# Altium PCB DIMNode012014.PcbDoc
Units mil, origin at the board's own origin, x right, y up, seen from the top; angles counter-clockwise.
Board outline 5320 x 3600 mil, 2 copper layers (TopLayer, BottomLayer); 120 components, 100 nets, 378 pads, 60 vias.
Unrouted connection lines stored in the file: 1.
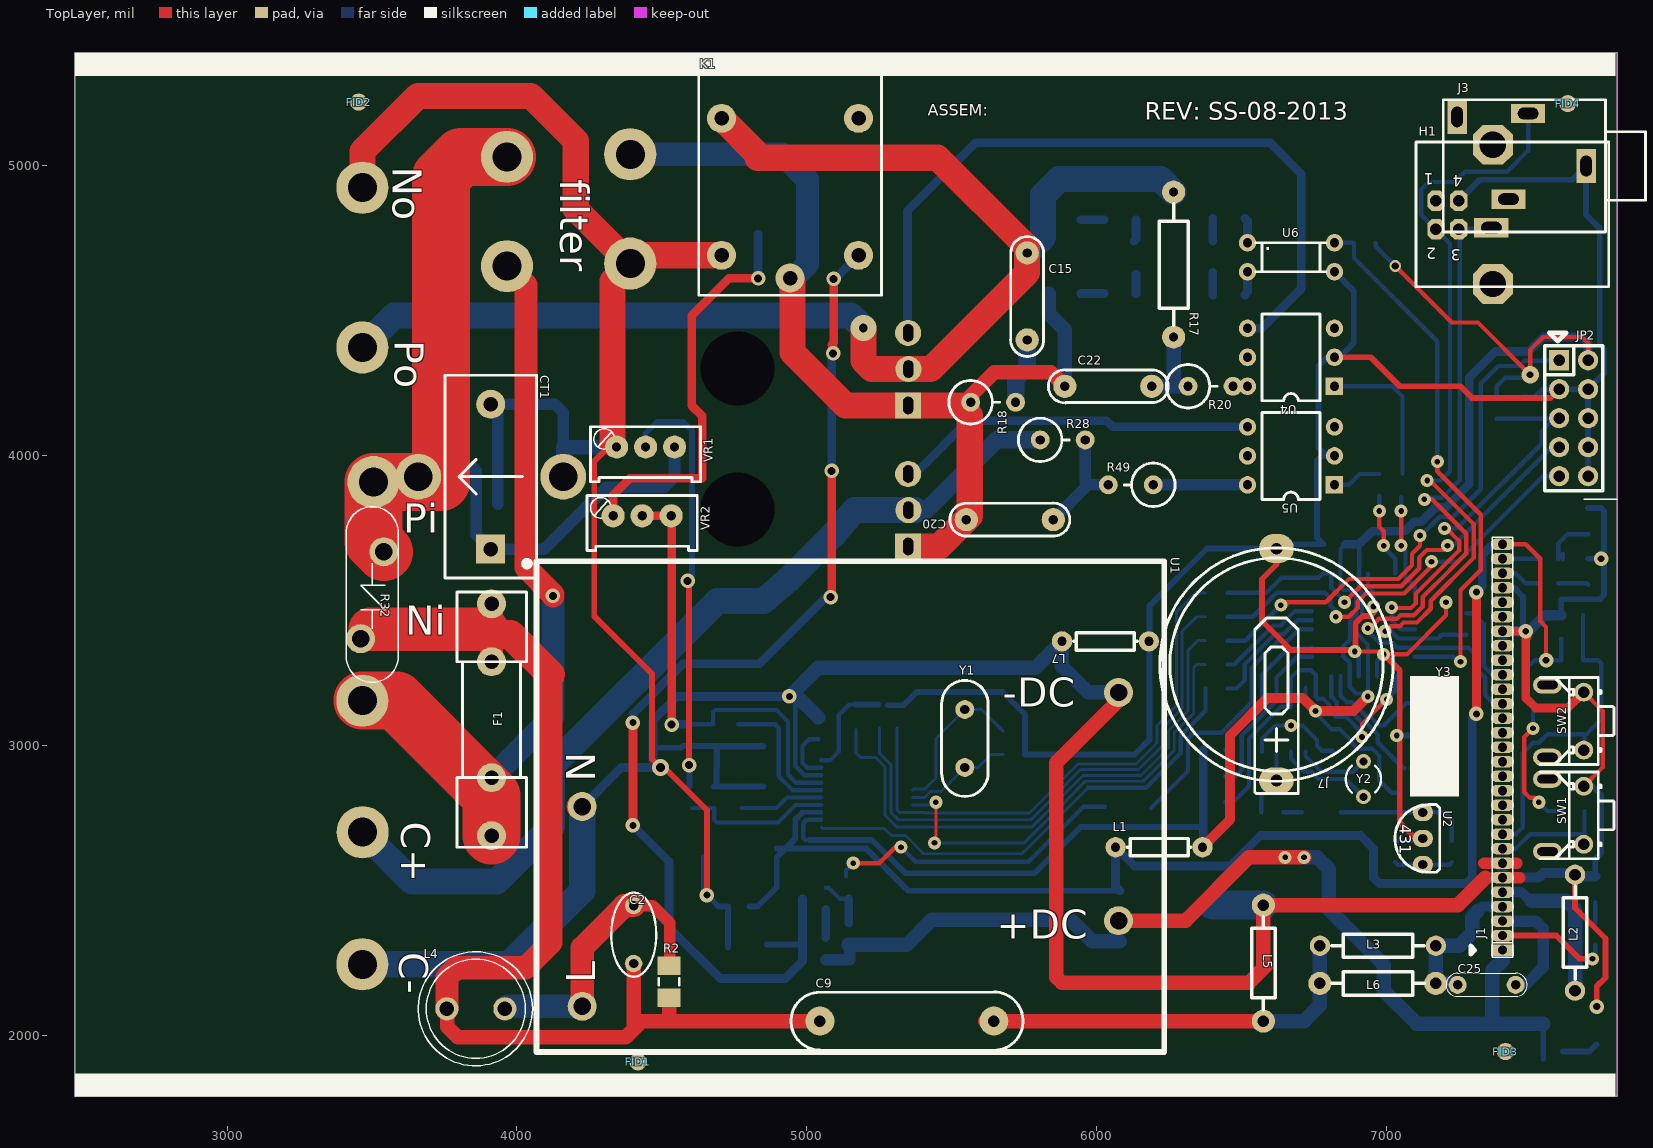
[diagram p0: TopLayer view]
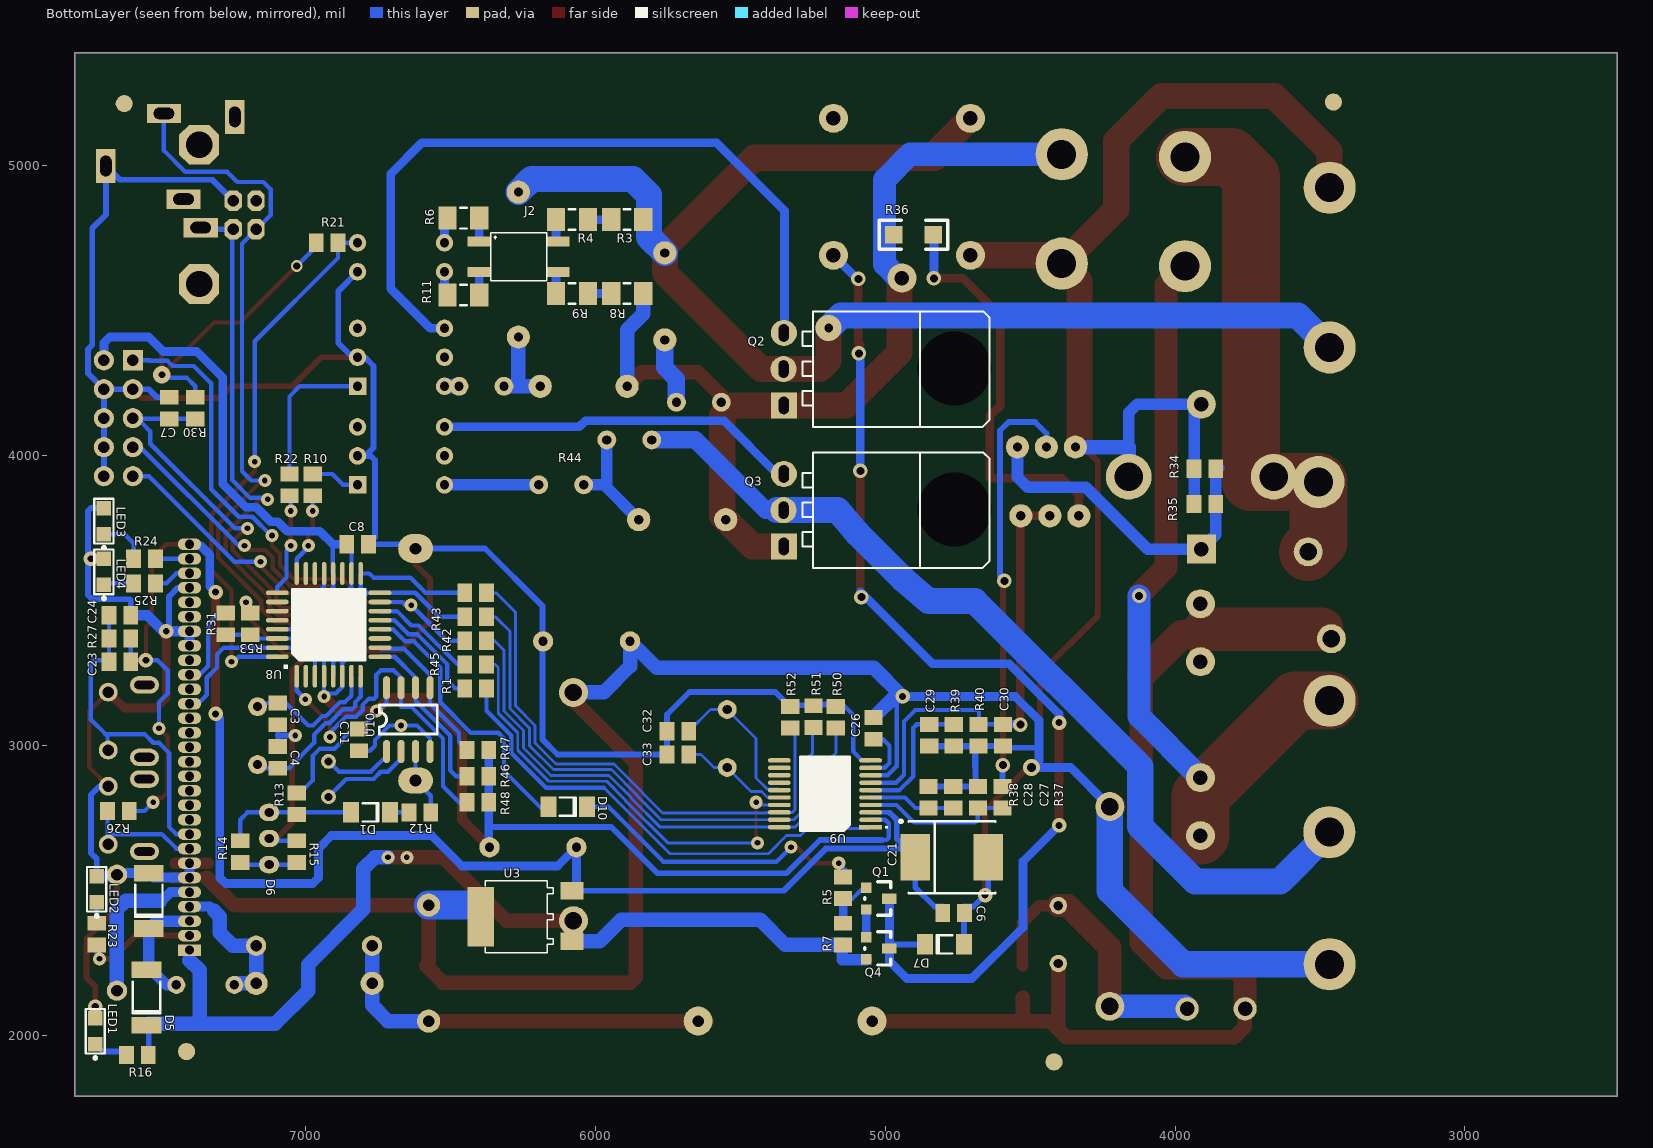
[diagram p1: BottomLayer view, seen from below]

## Layer stack, top to bottom
TopLayer: signal copper 1.4
Dielectric: dielectric 12.6, FR-4, Dk 4.8
BottomLayer: signal copper 1.4

## Board outline
2475,1790 2475,5390 7795,5390 7795,1790

## Design rules (kind name [scope] priority, off if disabled: settings)
Clearance Clearance_1 [All vs (InPoly)] p1: gap=15
Clearance [All] p2: gap=10
ComponentClearance [All] p1 off: gap=10 collisioncheckmode=3 verticalgap=10 showdistances=FALSE
FabricationTestPointUsage TestPointUsage [All] p1: valid=0 allowmultiple=FALSE
FabricationTestpoint Testpoint [All] p1: side=3 testpointundercomponent=TRUE minsize=40 maxsize=100 preferedsize=60 minholesize=20 maxholesize=40 preferedholesize=32 testpointgrid=1 allowsidetop=TRUE allowsidebottom=TRUE usegrid=TRUE gridtolerance=0.01
HoleSize HoleSize_1 [All] p1: absolutevalues=TRUE maxlimit=1000 minlimit=0 maxpercent=80.000 minpercent=20.000
PasteMaskExpansion PasteMaskExpansion_1 [HasPad('DES*')] p1: expansion=-160
PasteMaskExpansion [All] p2: expansion=0
PolygonConnect [All vs IsVia] p1: connectstyle=Direct reliefconductorwidth=20 reliefentries=4 polygonreliefangle="90 Angle"
PolygonConnect PolygonConnect_1 [All] p2: connectstyle=Relief reliefconductorwidth=20 reliefentries=4 polygonreliefangle="90 Angle"
RoomDefinition DIMNode062013 [InComponentClass('DIMNode062013')] p1 off: confinementstyle=ConfineIn formatcopy=TRUE lockcomponents=FALSE outline 0,0 2000,0 2000,1000 0,1000
RoutingVias [All] p1: holewidth=25 width=40 viastyle="Through Hole" minholewidth=15 minwidth=30 maxholewidth=80 maxwidth=150
SilkscreenOverComponentPads [IsPad] p1: minsilkscreentomaskgap=10
SolderMaskExpansion SolderMaskExpansion_1 [HasPad('DES*')] p1: expansion=40
SolderMaskExpansion [All] p2: expansion=4
Width [All] p1: maxlimit=1000 minlimit=10 preferedwidth=30
22 further rules are at their usual default settings.

## Components (designator, comment, footprint, x,y, rotation, side; value= is the part's Value field where it differs from the comment)
C2 "15nF" CAPNTO5.08-7.37x3.94 4402.56,2348.43 r90 top
C3 "22p" 2012[0805] 7095,3110 r270 bottom
C4 "22p" 2012[0805] 7095,2960 r90 bottom
C6 "104" 2012[0805] 4763.78,2423.23 r180 bottom
C7 "104" 2012[0805] 7470,4165 r90 bottom
C8 "104" 2012[0805] 6820,3695 r0 bottom
C9 "104/275VAC" 100N400V 5045,2050 r0 top
C11 "104" 2012[0805] 6815,3020 r270 bottom
C15 "103/2kV" 104TO 5760,4700 r270 top
C20 "103/2kV" 104TO 5550,3780 r0 top
C21 "100u25V" TC7360-2924 4770,2615 r180 bottom
C22 "103/2kV" 104TO 6190,4240 r180 top
C23 "68p" 2012[0805] 7640,3290 r180 bottom
C24 "68p" 2012[0805] 7640,3450 r180 bottom
C25 "105" CSIP3 7445,2175 r180 top
C26 "104" 2012[0805] 5040,3060 r90 bottom
C27 "333" 2012[0805] 4680,2822.4 r90 bottom
C28 "333" 2012[0805] 4765,2822.4 r90 bottom
C29 "333" 2012[0805] 4848.03,3036.42 r270 bottom
C30 "333" 2012[0805] 4593.03,3036.42 r270 bottom
C32 "22p" 2012[0805] 5715,3050 r0 bottom
C33 "22p" 2012[0805] 5715,2970 r0 bottom
CT1 "AX0500" CT-NHO 3909.45,3678.15 r90 top
D1 "1N4148" SOD-80/MLL34 6775,2770 r180 bottom
D5 "M7" MELF-D5022-2009 7548.23,2131.89 r270 bottom
D6 "M7" MELF-D5022-2009 7540,2465 r270 bottom
D7 "1N4148" SOD-80/MLL34 4795.28,2314.96 r0 bottom
D10 "Z9V" SOD-80/MLL34 6095,2790 r180 bottom
F1 "FUSE 5A" FUSE2 3912.4,2889.76 r90 top
FID1 "FIDUCIALMASK" FIDUCIALMASK 4417.32,1909.45 r0 top
FID2 "FIDUCIALMASK" FIDUCIALMASK 3453.74,5220.47 r0 top
FID3 "FIDUCIALMASK" FIDUCIALMASK 7410,1945 r0 top
FID4 "FIDUCIALMASK" FIDUCIALMASK 7625,5215 r0 top
H1 "USB" USB-B-STRANGE 7170,4880 r180 top
J1 "PL3120 Module" ECHELONMODULE 7400,2295 r90 top
J2 "Bridge 1A SMD" CAUSMD 6400,4740 r180 bottom
J3 "DEBUG" SJ-3515 7755,5000 r270 top (schematic designator J2)
J7 "BATTERY" pincucao 6620,2880 r180 top
JP2 "ICSP" IDC10 7595,4330 r270 top
K1 "Relay" RELAYVUONG 4705.71,4691.93 r0 top
L1 "10uH/2A" axial0.3 6065,2650 r0 top
L2 "680uH" AXIAL0.4#1 7650,2155 r90 top
L3 "10uH" AXIAL0.4#1 7170,2310 r180 top
L4 "330uH" CAMTRONDUNG 3758.86,2092.52 r0 top
L5 "680uH" axial0.4 6575,2050 r90 top
L6 "10uH" AXIAL0.4#2 7170,2180 r180 top
L7 "choke" axial0.3 5880,3360 r0 top
LED1 "TXON_LED" LED0805 7725,2015 r90 bottom
LED2 "TXON_LED" LED0805 7720,2505 r90 bottom
LED3 "PKD_LED" LED0805 7695,3775 r90 bottom
LED4 "BIU_LED" LED0805 7695,3600 r90 bottom
Q1 "2N3906" SOT-23 5065,2510 r270 bottom
Q2 "BTA20" TO254 5349.41,4174.21 r180 bottom
Q3 "BTA20" TO254 5349.41,3687.6 r180 bottom
Q4 "2N3906" SOT-23 5064.96,2338.58 r270 bottom
R1 "100R" 2012[0805] 6412.6,3197.5 r0 bottom
R2 "330" 3216[1206] 4524.61,2186.02 r270 top
R3 "10k 1/4W" 3216[1206] 5889.88,4815 r180 bottom
R4 "10k 1/4W" 3216[1206] 6080,4815 r180 bottom
R5 "2K2" 2012[0805] 5145,2510 r270 bottom
R6 "10k 1/4W" 3216[1206] 6455,4820 r180 bottom
R7 "2k2" 2012[0805] 5145,2350 r270 bottom
R8 "10k 1/4W" 3216[1206] 5890,4560 r180 bottom
R9 "10k 1/4W" 3216[1206] 6080,4560 r180 bottom
R10 "470R" 2012[0805] 6975,3900 r90 bottom
R11 "10k 1/4W" 3216[1206] 6455,4555 r180 bottom
R12 "470R" 2012[0805] 6605,2770 r0 bottom
R13 "220R" 2012[0805] 7030,2800 r90 bottom
R14 "4k7" 2012[0805] 7225,2635 r90 bottom
R15 "10k" 2012[0805] 7030,2635 r270 bottom
R16 "1k" 2012[0805] 7579.72,1933.07 r0 bottom
R17 "470R/1W" AXIAL0.5 6265,4410 r90 top
R18 "33R/1W" R1W_DUNG 5564.96,4185.04 r180 top
R20 "470R/1W" R1W_DUNG 6315,4240 r180 top
R21 "2k2" 2012[0805] 6925,4735 r0 bottom
R22 "470R" 2012[0805] 7055,3900 r270 bottom
R23 "1K" 2012[0805] 7720,2350 r90 bottom
R24 "1K" 2012[0805] 7555,3645 r0 bottom
R25 "1K" 2012[0805] 7555,3560 r0 bottom
R26 "1K" 2012[0805] 7645,2775 r0 bottom
R27 "1K" 2012[0805] 7640,3370 r0 bottom
R28 "470R/1W" R1W_DUNG 5805,4055 r180 top
R30 "10K" 2012[0805] 7380,4165 r90 bottom
R31 "470R" 2012[0805] 7275,3420 r90 bottom
R32 "MOV 14D471" MOV471 3460.63,3369.09 r90 top
R34 "220R" 2012[0805] 3896.65,3955.71 r180 bottom
R35 "220R" 2012[0805] 3896.65,3833.66 r180 bottom
R36 "820k" 1206 4834.65,4762.8 r0 bottom
R37 "1k" 2012[0805] 4595,2822.4 r90 bottom
R38 "1k" 2012[0805] 4850,2822.4 r90 bottom
R39 "1k" 2012[0805] 4763.03,3036.42 r270 bottom
R40 "1k" 2012[0805] 4678.03,3036.42 r90 bottom
R42 "10R" 2012[0805] 6412.6,3362.5 r180 bottom
R43 "10R" 2012[0805] 6412.6,3445 r180 bottom
R44 "10R" 2012[0805] 6412.6,3527.5 r180 bottom
R45 "10R" 2012[0805] 6412.6,3280 r180 bottom
R46 "2k2" 2012[0805] 6405,2895 r180 bottom
R47 "2k2" 2012[0805] 6405,2985 r180 bottom
R48 "2k2" 2012[0805] 6405,2805 r180 bottom
R49 "470R/1W" R1W_DUNG 6195,3900 r0 top
R50 "470R" 2012[0805] 5170.28,3098.43 r90 bottom
R51 "470R" 2012[0805] 5247.05,3100.39 r90 bottom
R52 "470R" 2012[0805] 5327.76,3098.43 r90 bottom
R53 "5k6" 2012[0805] 7190,3420 r90 bottom
SW1 "SERVICE" CTCHIPNGANG 7680,2660 r90 top
SW2 "RESET" CTCHIPNGANG 7680,2985 r90 top
U1 "APCN" APCN 4225,2790 r0 top
U2 "TL431" TL431 7125,2770 r270 top
U3 "7805" J7805 6080,2325 r90 bottom
U4 "MOC3021" DIP6 6820,4240 r180 top
U5 "MOC3041" DIP6 6820,3900 r180 top
U6 "PC817" TLP521 6520,4735 r180 top
U8 "ATMEGA8" ATMEGA8 7030,3240 r180 bottom
U9 "ADE7753" ADE775X 5050.04,2719.02 r0 bottom
U10 "DS1307" SO-8 6720,2980 r90 bottom
VR1 "1k" BTXANH 4343.5,4030.51 r0 top
VR2 "100K" BTXANH 4331.69,3793.31 r0 top
Y1 "3.57954 MHz" XTAL 5545,3125 r270 top
Y2 "32,768k" R38 6920,2885 r0 top
Y3 "8 MHz" XTAL 7165,3135 r270 top

## Footprints (in the part's own frame and the unit in brackets; to place one, negate y for a bottom-side part, rotate by r counter-clockwise, add the part's x,y. Pads: shape width x height; smd on the part's side, far side on the other; paste and mask are expansions set on the pad)
100N400V [mil]
  round 100 hole 40: 1(0,0) 2(600,0)
  silkscreen extent -99,-101 700,101
104TO [mil]
  round 80 hole 32: 1(0,0) 2(300,0)
  silkscreen extent -57,-57 357,57
1206 [mil]
  rect 60x60 smd: 1(0,0) 2(135,0)
  silkscreen extent -50,-50 185,50
2012[0805] [mm] "Metal Electrode Face (MELF) Resistor; Body 2 x 1.4 mm (LxDia)"
  rect 1.3x1.6 smd: 1(-0.95,0) 2(0.95,0)
3216[1206] [mm] "Metal Electrode Face (MELF) Resistor; Body 3.2 x 1.8 mm (LxDia)"
  rect 1.6x2 smd: 1(-1.4,0) 2(1.4,0)
  silkscreen extent -0.3,-0.9 0.3,0.9
ADE775X [mm]
  rect 2x0.381 smd: 1(0,0)
  oval 2x0.381 smd: 2(0,-0.65) 3(0,-1.3) 4(0,-1.95) 5(0,-2.6) 6(0,-3.25) 7(0,-3.9) 8(0,-4.55) 9(0,-5.2) 10(0,-5.85) 11(8,-5.85) 12(8,-5.2) 13(8,-4.55) 14(8,-3.9) 15(8,-3.25) 16(8,-2.6) 17(8,-1.95) 18(8,-1.3) 19(8,-0.65) 20(8,0)
  silkscreen extent -1.52,-6.18 6.17,0.33
APCN [mm] "AC - DC convert module 15W"
  round 2.54 hole 1.524: 2(0,0) 3(0,-17.5) 4(47,10) 6(47,-10)
  silkscreen extent -4,-21.5 51,21.5
ATMEGA8 [mm]
  oval 0.4x2 smd: 1(0,0) 2(0.8,0) 3(1.6,0) 4(2.4,0) 5(3.2,0) 6(4,0) 7(4.8,0) 8(5.6,0) 17(5.6,9) 18(4.8,9) 19(4,9) 20(3.2,9) 21(2.4,9) 22(1.6,9) 23(0.8,9) 24(0,9)
  oval 2x0.4 smd: 9(7.3,1.7) 10(7.3,2.5) 11(7.3,3.3) 12(7.3,4.1) 13(7.3,4.9) 14(7.3,5.7) 15(7.3,6.5) 16(7.3,7.3) 25(-1.7,7.3) 26(-1.7,6.5) 27(-1.7,5.7) 28(-1.7,4.9) 29(-1.7,4.1) 30(-1.7,3.3) 31(-1.7,2.5) 32(-1.7,1.7)
  silkscreen extent -1.16,0.64 5.97,7.62
axial0.3 [mil]
  round 70 hole 32: 1(0,0) 2(300,0)
  silkscreen extent 41,-30 259,30
AXIAL0.4#1 [mil]
  round 70 hole 40: 1(0,0) 2(400,0)
  silkscreen extent 40,-40 360,40
AXIAL0.4#2 [mil]
  round 80 hole 40: 1(0,0) 2(400,0)
  silkscreen extent 40,-40 360,40
axial0.4 [mil]
  round 80 hole 40: 1(0,0) 2(400,0)
  silkscreen extent 40,-40 360,40
AXIAL0.5 [mil]
  round 80 hole 32: 1(0,0) 2(500,0)
  silkscreen extent 40,-50 460,50
BTXANH [mil]
  round 80 hole 32: 1(0,0) 2(100,0) 3(200,0)
  silkscreen extent -90,-120 290,70
CAMTRONDUNG [mil]
  round 80 hole 50: 1(-0.63,0) 2(199.37,0)
  silkscreen extent -99,-197 295,197
CAPNTO5.08-7.37x3.94 [mil] "Capacitor, Radial, Tantalum, Non-Polarised; Body 7.37 x 3.94 x 6.86 mm (WxTxH max); Pin Spacing 5.08 mm (typ)"
  round 60 hole 32: 1(-100,0) 2(100,0)
  silkscreen extent -145,-78 145,77
CAUSMD [mil]
  rect 80x35 smd: 1(0,0) 2(271.65,0) 3(271.65,-106.3) 4(0,-106.3)
  silkscreen extent 39,-136 232,30
CSIP3 [mil]
  round 62 hole 32: 1(0,0) 2(200,0)
  silkscreen extent -40,-40 240,40
CT-NHO [mm]
  rect 2.54x2.54 hole 1.27: 1(0,0)
  round 4 hole 2.5: 2(6.35,-6.35) 4(6.35,6.35)
  round 2.54 hole 1.27: 3(12.7,0)
  silkscreen extent -2.54,-4 15.24,4
CTCHIPNGANG [mil]
  oval 60x100 hole 30 slot 70 at 90 deg: 0(-25,125) 0(225,125)
  round 65 hole 40: 1(0,0) 2(200,0)
  silkscreen extent -50,-105 250,150
DIP6 [mil]
  rect 60x60 hole 32: 1(0,0)
  round 60 hole 32: 2(0,-100) 3(0,-200) 4(300,-200) 5(300,-100) 6(300,0)
  silkscreen extent 50,-250 250,50
ECHELONMODULE [mil]
  rect 40x80 hole 32: 1(0,0)
  oval 40x80 hole 32: 2(50,0) 3(100,0) 4(150,0) 5(200,0) 6(250,0) 7(300,0) 8(350,0) 9(400,0) 10(450,0) 11(500,0) 12(550,0) 13(600,0) 14(650,0) 15(700,0) 16(750,0) 17(800,0) 18(850,0) 19(900,0) 20(950,0) 21(1000,0) 22(1050,0) 23(1100,0) 24(1150,0) 25(1200,0) 26(1250,0) 27(1300,0) 28(1350,0) 29(1400,0)
  silkscreen extent -25,-35 1425,35
FIDUCIALMASK [mm]
  round 1.5 all layers, no hole: 1(0,0)
FUSE2 [mil]
  round 100 hole 50: 1(-200,0) 1(0,0) 2(400,0) 2(600,0)
  silkscreen extent -240,-120 640,120
IDC10 [mil]
  rect 70x70 hole 40: 1(0,0)
  round 70 hole 40: 2(0,100) 3(100,0) 4(100,100) 5(200,0) 6(200,100) 7(300,0) 8(300,100) 9(400,0) 10(400,100)
  silkscreen extent -50,-50 450,150
J7805 [mil]
  rect 60x80 smd: 1(0,0) 3(175,0)
  rect 205x90 smd: 2(85,315)
  silkscreen extent -40,65 210,300
LED0805 [mil] "Chip Resistor; Body 2.0 x 1.3 mm (LxW typ)"
  rect 50x50 smd: 1(-45,0) 2(45,0)
  silkscreen extent -97,-33 77,33, body extent -60,-25 60,25, height 47
MELF-D5022-2009 [mm] "Metal Electrode Face (MELF) Diode; Body 5 x 2.5 mm (LxDia)"
  rect 1.45x2.6 smd: 1(-2.425,0) 2(2.425,0)
  silkscreen extent -1.4,-1.2 1.4,1.2
MOV471 [mil]
  round 100 hole 60: 1(0,0) 2(300,-80)
  silkscreen extent -150,-130 455,50
pincucao [mil]
  oval 120x90 hole 40: 1(0,0)
  oval 120x100 hole 40: 2(0,-800)
  silkscreen extent -403,-803 403,45
R1W_DUNG [mil]
  round 65 hole 32: 1(0,0) 2(-155,0)
  silkscreen extent -100,-75 75,75
R38 [mm] "Crystal, Thru-Hole; 2 Leads; Body 3.1 x 8.2 mm (Dia.xH)"
  round 1.3 hole 0.7: 1(0,1.55) 2(0,-1.55)
  silkscreen extent -1.55,-1.19 1.55,1.17
RELAYVUONG [mm]
  round 2.54 hole 1.27: 1(6,-2) 2(0,12) 3(12,12) 4(12,0) 5(0,0)
  silkscreen extent -2,-3.5 14,16
SJ-3515 [mm] "3.5mm AUDIO JACK-STEREO"
  rect 3x1.7 hole 1 slot 1.8 at 0 deg: 1(0,-1.7) 5(-4.3,-13)
  rect 1.7x3 hole 1 slot 1.8 at 90 deg: 2(-4.6,-6.78) 3(2.9,-8.5) 4(5.4,-10)
  silkscreen extent -5.8,-14.21 5.8,3.5
SO-8 [mil]
  oval 80x24 smd: 1(0,0) 2(0,-50) 3(0,-100) 4(0,-150) 5(220,-150) 6(220,-100) 7(220,-50) 8(220,0)
  silkscreen extent 60,-175 160,25
SOD-80/MLL34 [mm] "Metal Electrode Face (MELF) Diode; Body 3.5 x 1.7 mm (LxDia)"
  rect 1.4x1.8 smd: 1(-1.7,0) 2(1.7,0)
  silkscreen extent -0.7,-0.8 0.7,0.8
SOT-23 [mil]
  rect 36x36 smd: 1(0,0) 2(75,0)
  rect 36x50 smd: 3(38,80)
  silkscreen extent -20,-5 95,85
TC7360-2924 [mm] "Capacitor, SM Tantalum; Body 7.3 x 6.0 mm (LxW typ)"
  rect 2.6x4.1 smd: 1(-3.2,0) 2(3.2,0)
  silkscreen extent -4.58,-3.15 3.8,3.27
TL431 [mil]
  oval 60x70 hole 32: 1(0,0) 2(90,0) 3(180,0)
  silkscreen extent -27,-96 207,58
TLP521 [mil]
  round 60 hole 32: 1(0,0) 2(0,100) 3(-300,0) 4(-300,100)
  silkscreen extent -270,0 -30,100
TO254 [mil] "D-PAK, 4-Leads, Body 8x9.4mm, Pitch 2.54mm, Lead Span 10.6mm, IPC Low Density"
  rect 90x90 hole 35 slot 60 at 90 deg: 1(0,0)
  round 90 hole 35 slot 60 at 90 deg: 2(-0.94,125) 3(0,250)
  round 236.22 hole 255.91: H(589.06,127)
  silkscreen extent 65,-75 710,324, body extent 250,-63 713,313, height 81
USB-B-STRANGE [mm] "USB Type B - STRANGE - Slave Device"
  oct 1.5x1.8 hole 1: 1(0,0) 2(0,2.5) 3(-2,2.5) 4(-2,0)
  oct 3.5x3.5 hole 2.3: 5(-4.988,7.283) 6(-4.988,-4.909)
  silkscreen extent -15.15,-5.16 1.74,7.54, body extent -15.45,-6.18 0.85,8.68, height 10.98
XTAL [mil]
  round 65 hole 32: 1(0,0) 2(200,0)
  silkscreen extent -100,-80 300,80

## Part data
C2 C6 C7 C8 C9 C11 C15 C20 C22 C23 C24 C25: library part CAP, "Capacitor"
C3 C4 C26 C27 C28 C29 C30 C32 C33: library part CAP
C21: library part "CAPACITOR POL", "Capacitor"
CT1: library part AX-0500
D1 D7: library part "Diode 1N4007", "1 Amp General Purpose Rectifier"
D5 D6 LED1 LED2 LED3 LED4: library part DIODE
D10: library part ZENER2, "Zener Diode"
F1: library part FUSE2, "Fuse"
J1: library part CON29, "Connector"
J2: library part "Diode Bridge Flate", "Diode Bridge"
J3: library part USB_B
J7: library part CON2, "Connector"
JP2: library part "HEADER 5X2"
K1: "SPDT Relay"
L1 L4 L5: library part "INDUCTOR IRON"
L2 L3 L6: library part INDUCTOR
L7: library part Inductor
Q1 Q4: library part PNP1, "PNP Transistor"
Q2 Q3: library part TRIAC
R1 R3 R4 R6 R8 R9 R11 R12 R13 R14 R15 R16 R17 R18 R20 R21 R22 R23 R24 R25 R26 R27 R28 R30 R31 R49: library part RES1
R2 R5 R7 R10 R50 R51 R52 R53: library part "Res Semi", "Semiconductor Resistor"
R32: library part MOV
R34 R35 R36 R37 R38 R39 R40 R42 R43 R44 R45 R46 R47 R48: library part RES2
SW1 SW2: library part SW-PB
U1: library part Component_1
U2: "Adjustable Precision Shunt Regulator"
U3: library part MC7805T
U4 U5: library part OPTOTRIAC
U6: library part OPTOISO1, "Optoisolator"
U8: library part ATMEGA8-A, "TQFP package"
U9: library part ADE775X
U10: library part DS1307(8), "64x8 SERIAL REAL TIME CLOCK"
VR1 VR2: library part RPot, "Potentiometer"
Y1 Y3: library part CRYSTAL, "Crystal"
Y2: library part XTAL, "Crystal Oscillator"

## Free pads (board coordinates)
  round 10 hole 60 slot 400 at 90 deg: 0(1698.82,3017.72)
  round 180 hole 100: 0(3466.54,3155.51) 0(3965.55,4654.53) 0(3965.55,5031.5) 2(3504.92,3909.45) 4(3466.54,2246.06) 4(3467.52,2701.77) 4(4390.75,4663.39) 4(4390.75,5040.35) 5(3466.54,4374.02) 6(3466.54,4925.2)

## Via types
v1: diameter 45, hole 19.68, TopLayer to BottomLayer, 37 vias
v2: diameter 50, hole 28, TopLayer to BottomLayer, 9 vias
v3: diameter 50, hole 23.62, TopLayer to BottomLayer, 9 vias
v4: diameter 90, hole 30, TopLayer to BottomLayer, 1 vias
v5: diameter 60, hole 23.62, TopLayer to BottomLayer, 1 vias
v6: diameter 40, hole 25, TopLayer to BottomLayer, 1 vias
v7: diameter 50, hole 25, TopLayer to BottomLayer, 1 vias
v8: diameter 60, hole 32, TopLayer to BottomLayer, 1 vias

## Nets (pads, with @x,y where several pads share a name; then routed paths per layer and width w, separated by ;. In a path a pad name is that pad's centre, name@x,y a point inside that pad or via, vN(x,y) a via of type N, cw(c..) or ccw(c..) an arc to the next point about the centre after c; other vN are vias at no path point)
3V7: D1.1 R13.1 R14.2 U2.1 | length 466
  BottomLayer w15: D1.1 U2.1 7200,2770 7225,2745 R14.2
AGND: C6.2 C21.2 C24.2 C26.2 C27.2 C28.2 C29.2 C30.2 CT1.2 CT1.3 D6.1 D7.1 J1.6 J1.7 J1.22 J1.23 J1.26 K1.5 L2.2 L5.2 L7.1 LED1.2 LED2.2 LED3.2 LED4.2 pad.4@3466.54,2246.06 pad.4@4390.75,4663.39 pad.6 R34.1 R35.1 R38.2 R39.2 R40.1 SW1.2 SW2.2 U1.2 U1.4 U3.2 U9.8 VR1.1 | length 17135.9
  TopLayer w15: SW1.2 7745,2925 7745,3120 SW2.2
  TopLayer w20: VR1.1@4329.72,4044.29 4266.73,3981.3 4266.73,3446.85 4465.55,3248.03 4465.55,2954.45 v8(4495,2925) 4508.07,2925 4655,2778.07 v3(4655,2485) ; L2.2 7650,2440 7755,2335 7755,2200 7725,2170 v7(7725,2100)
  TopLayer w30: J1.23 7465,3395 7485,3375 7480,3370 7480,3165 7515,3130 7625,3130 SW2.2
  TopLayer w35: 7340,2545 J1.6
  TopLayer w39: 7335,2595 J1.7 7449.53,2595 ; J1.6 7459.53,2545
  TopLayer w50: U1.4 6075.39,3157.09 5860.24,2941.93 5860.24,2201.77 5878.94,2183.07 6525.59,2183.07 6583.66,2241.14 6575,2249.8 L5.2 7245,2450 7340,2545
  TopLayer w90: pad.6 3466.54,5050.2 3658.46,5242.13 4047.24,5242.13 4202.76,5086.61 4202.76,4851.38 pad.4@4390.75,4663.39 ; U1.2@4215.91,2790 U1.2 ; VR1.1@4329.72,4044.29 4329.72,4602.36 pad.4@4390.75,4663.39 ; K1.5 4419.29,4691.93 pad.4@4390.75,4663.39
  BottomLayer w15: v3(4940,3170) 4960,3150 4960,2929.64 4991.49,2898.15 U9.8
  BottomLayer w20: 4469.49,2993.11 4565.94,2993.11 4572.83,3000 4687.99,3000 R40.1@4687.99,2999.02 ; C30.2 R40.1 R40.1@4687.99,2999.02 ; C21.2 4644.02,2495.98 v3(4655,2485) 4695,2445 4727.6,2445 4728.07,2444.53 D7.1@4728.07,2304.13 ; C27.2 4687.99,2867.8 R40.1@4687.99,2999.02 ; C27.2@4690,2859.8 C28.2 ; 4690,2925.2 4690,2997.05 4850,2997.05 C29.2 R39.2 R40.1@4687.99,2999.02 ; C28.2@4775,2859.8 R38.2 ; J1.26 7440,3545 7470,3515 v3@7470,3395 ; C24.2 7602.6,3502.6 7605,3505 7735,3505 7750,3520 7750,3675 ; SW1.2 7710,2860 7740,2830 7740,2630 7720,2610 LED2.2 ; LED4.2 7720,3645 7750,3675 ; LED3.2 7740,3820 7750,3810 7750,3675
  BottomLayer w30: U1.2 4360,2925 v8(4495,2925) 4469.49,2950.51 4469.49,2993.11 4469.49,3087.6 4551.89,3170 v3(4940,3170)
  BottomLayer w35: J1.7 J1.6 7524.53,2545 D6.1 7644.53,2560.47 L2.2 7655,2550 LED2.2 ; J1.22 J1.23 7470,3395 7490,3395 7545,3450 C24.2
  BottomLayer w40: R35.1 R34.1 3934.05,4153.54 CT1.3 4130.91,4178.15 4159.45,4149.61 4159.45,4029.53
  BottomLayer w50: CT1.2 4159.45,4029.53 4160.43,4030.51 VR1.1 ; C26.2 4967.4,3170 v3(4940,3170) 5038.7,3268.7 5788.7,3268.7 L7.1 5880,3275 5971.3,3183.7 U1.4
  BottomLayer w90: pad.4@3466.54,2246.06 3971.46,2246.06 4225,2499.61 U1.2
  BottomLayer w100: U3.2@6400,2450 L5.2
  other v3: 7480,3395 7740,3645
BIU: J1.27 R25.1 | length 147.1
  BottomLayer w15: J1.27 7445,3595 7480,3560 R25.1@7532.6,3560
CAPCON: R10.1 U8.24 | length 291.1
  TopLayer w15: v1(6975,3810) 6975,3755 6990,3740 v1(6990,3690)
  BottomLayer w15: v1(6975,3810) R10.1 ; v1(6990,3690) 6990,3685 7030,3645 U8.24
CF: U9.11
CS: R45.1 U8.14 | length 369
  BottomLayer w15: R45.1 6474.29,3280 6609.29,3415 6635,3415 6684.41,3464.41 U8.14
DIMCONTROL: R22.2 U8.25 | length 349.6
  TopLayer w15: v1(7050,3690) v1(7050,3810)
  BottomLayer w15: v1(7050,3690) 7065,3675 7065,3580 7096.93,3548.07 U8.25 ; v1(7050,3810) R22.2@7050,3857.6
EXT_CAP: pad.4@3467.52,2701.77 Q3.2 R28.1 | length 3161.1
  BottomLayer w60: Q3.2@5373.66,3812.6 5412.01,3812.6 5654.41,4055 R28.1
  BottomLayer w90: pad.4@3467.52,2701.77 3637.8,2531.5 3930.12,2531.5 4120,2721.38 4120,2928.64 4690.38,3499.02 4850.39,3499.02 4937.65,3574.46 5094.44,3731.25 5163.98,3812.6 Q3.2@5373.66,3812.6
GND: C3.2 C4.2 C7.2 C8.1 C11.2 C32.2 C33.2 H1.4 J3.1 J7.2 JP2.3 JP2.4 JP2.6 JP2.8 JP2.10 L7.2 R15.1 R50.2 R51.2 R52.2 R53.2 U2.2 U4.2 U5.2 U6.4 U8.3 U8.5 U8.21 U9.10 U10.4 | length 9295.4
  TopLayer w15: v1@6665,3070 v1(6670,3070) ; v1(6890,3325) 6980,3325 v1(6990,3315) 7070,3315 7205,3450 v1(7205,3495) ; v1@6940,3480 v1(6955,3480)
  TopLayer w20: J7.2 6620,3625 6570,3575 6570,3430 6670,3330 v1@6885,3330 ; U4.2 6945,4340 7045,4240 7255,4240 7295,4200 7565,4200 JP2.3 ; v1(6890,3325) 6892.5,3327.5 6892.5,3422.6 6917.4,3447.5 6943.61,3447.5 6955,3458.89 v1(6955,3480) ; v1(6990,3315) 7045,3260 7045,2735 7100,2680 U2.2
  BottomLayer w15: U9.10 5079.33,2949.33 5110,2980 5110,3106.06 5145.94,3142.01 R50.2@5168.03,3142.01 ; U10.4 6570,3025 6615,3070 v1(6670,3070) 6710,3070 6760,3020 6760,3000 6777.4,2982.6 C11.2 ; v1(6890,3325) 6904.02,3310.98 U8.5 ; U8.21 6935.51,3549.49 6955,3530 v1(6955,3480) v1@6940,3480 ; U8.3 6967.01,3292.01 v1(6990,3315) ; R15.1 7117.4,2672.4 U2.2 ; C4.2 7095,3035 C3.2
  BottomLayer w20: R50.2@5168.03,3142.01 R51.2@5248.03,3142.01 ; 5279.53,3139.76 5333.66,3139.76 5378.9,3185 5675,3185 5752.4,3107.6 C32.2 C33.2 6130,2970 6182.5,3022.5 6182.5,3482.5 6380,3680 J7.2 ; J7.2@6635,3695 C8.1 6760,3717.6 6760,3985 6775,4000 U5.2 6793.31,4000 6765,4028.31 6765,4310 6795,4340 U4.2 6837.05,4340 6886.81,4389.76 6886.81,4568.19 U6.4 ; v1(7035,3035) 7095,3035 ; H1.4 7321.24,4952.5 7640.57,4952.5 J3.1 7688.07,4831.93 7735,4785 7735,4382.78 7750,4367.78 7750,4285 JP2.4 ; C7.2 7512.4,4202.4 7540,4230 JP2.4 ; JP2.10 JP2.8 JP2.6 JP2.4
IO_0: J1.10
IO_1: J1.11
IO_2: J1.12
IO_3: J1.13
IO_4: J1.14
IO_5: J1.15
IO_6: J1.16
IO_7: J1.17
IO_8: H1.3 J1.18 J3.4 U8.31 | length 2477.9
  TopLayer w15: v1@6950,3415 6972.5,3437.5 7035.53,3437.5 7048.03,3450 7094.64,3450 7125,3480.36 7125,3513.08 7220,3608.08 ; v1(7130,3850) 7156.57,3850 7275,3731.57 7275,3663.08 7222.44,3610.52
  BottomLayer w15: v1(6935,3405) 6935,3395 6975,3355 7019.64,3355 7036.22,3338.43 U8.31 7281.57,3338.43 7305,3315 7305,3269.64 7340,3234.64 7340,3175 7370,3145 J1.18 ; v1(7130,3850) 7135,3855 7191.21,3855 7252.5,3916.29 7252.5,4777.81 H1.3
  BottomLayer w20: H1.3 7355.47,4781.57 J3.4
IO_9: J1.19
IO_10: J1.20 R31.2 | length 297.9
  BottomLayer w15: R31.2 7297.6,3457.4 7335,3420 7335,3275 7365,3245 J1.20
IO_11: J1.21
IRQ: U9.14
LAMP: C15.1 K1.2 pad.5 Q2.2 R3.2 R17.2 | length 4666.3
  TopLayer w90: K1.2 4829.72,5040.35 4829.72,5028.54 5450.79,5028.54 5760,4719.33 C15.1 5760,4632.05 5427.17,4299.21 Q2.2 5224.41,4299.21 5194.88,4328.74 v4(5194.88,4440.94)
  BottomLayer w90: pad.5 3576.68,4484.17 5151.66,4484.17 v4(5194.88,4440.94) ; C15.1 5815,4755 5815,4900 5870,4955 6220,4955 R17.2
MISO: JP2.9 R43.1 U8.16 | length 1457.1
  TopLayer w15: v1@6830,3445 6869.64,3445 6900,3475.36 6900,3496.57 6928.43,3525 7060.71,3525 7155,3619.29 v1(7155,3635)
  BottomLayer w15: R43.1 6538.43,3445 6620.83,3527.4 U8.16 6787.6,3527.4 6805,3510 6805,3485 6825,3465 v1(6825,3445) ; v1(7155,3635) 7244.25,3635 7539.25,3930 JP2.9
MOSI: JP2.1 R42.1 U8.15 | length 1920.6
  TopLayer w15: v1(6635,3485) 6645,3495 6790,3495 6870,3575 7040,3575 7087.5,3622.5 7087.5,3662.5 7115,3690 v1(7115,3725)
  BottomLayer w15: R42.1 6512.5,3362.5 v1(6635,3485) 6655,3485 6665.9,3495.91 U8.15 ; v1(7115,3725) 7118.43,3725 7183.43,3790 7230,3790 7325,3885 7325,4250 7385,4310 7457.82,4310 7475.32,4327.5 7537.5,4327.5 7535,4330 JP2.1
NetC2_2: C2.2 L4.2 R2.1 U1.3 | length 1009.6
  TopLayer w40: C2.2 4468.9,2448.43 4527.56,2389.76 4527.56,2244.09 R2.1
  TopLayer w80: U1.3 4225,2303.74 4369.69,2448.43 C2.2
  BottomLayer w80: L4.2 3966.73,2101.02 U1.3
NetC3_1: C3.1 U8.7 Y3.1 | length 471
  BottomLayer w15: U8.7 6841.02,3172.72 6863.25,3150.49 6880.22,3150.49 6928.21,3102.5 6940.89,3102.5 6973.39,3070 6990,3070 7067.4,3147.4 C3.1 7152.6,3147.4 Y3.1
NetC4_1: C4.1 U8.8 Y3.2 | length 533.2
  BottomLayer w15: U8.8 6809.53,3168.86 6827.5,3150.89 6827.5,3137.14 6839.15,3125.49 6869.86,3125.49 6917.86,3077.5 6930.53,3077.5 6970,3038.03 6970,3010 7057.4,2922.6 7060.43,2922.6 ; C4.1@7085.43,2922.6 C4.1 7152.6,2922.6 Y3.2
NetC9_2: C9.2 L3.2 L5.1 L6.2 | length 1379.9
  TopLayer w50: C9.2@5615,2050 L5.1
  BottomLayer w50: L5.1 6715,2050 6770,2105 L6.2 ; L6.2@6765,2185 6770,2190 L3.2
NetC15_2: C15.2 R18.2 | length 231.5
  BottomLayer w60: R18.2 5720,4185.08 5720,4265 5760,4305 C15.2
NetC20_2: C20.2 R28.2 R49.2 | length 404.7
  BottomLayer w40: C20.2 5970,3900 ; R28.2 5960,3900 5970,3900 ; R49.2 5970,3900
NetC22_1: C22.1 R17.1 R20.1 | length 295
  BottomLayer w50: C22.1 6265,4240 ; R17.1 6265,4240 ; R20.1 6265,4240
NetC26_1: C26.1 U9.9 | length 196.1
  BottomLayer w15: C26.1 5007.6,3022.6 4985,3000 4985,2940 5001.26,2923.74 U9.9
NetC27_1: C27.1 R37.1 U9.4 | length 514.4
  BottomLayer w15: R37.1@4605,2785 C27.1 4680,2745 4690,2735 4900,2735 4960.79,2795.79 U9.4
NetC28_1: C28.1 R38.1 U9.5 | length 290.1
  BottomLayer w15: C28.1@4775,2785 R38.1 4895,2785 4931.38,2821.38 U9.5
NetC29_1: C29.1 R39.1 U9.6 | length 479
  BottomLayer w15: R39.1 C29.1 4890.75,3073.82 4902.56,3062.01 4902.56,2894.68 4950.28,2846.97 U9.6
NetC30_1: C30.1 R40.2 U9.7 VR2.2 VR2.3 | length 1597.5
  TopLayer w30: VR2.2 VR2.3 4533.46,3791.54 v2(4533.46,3072.83)
  BottomLayer w15: C30.1 R40.2 4676.18,3075.67 4676.18,3116.14 4683.07,3123.03 4895.63,3123.03 4935,3083.66 4935,2899.65 4962.09,2872.56 U9.7
  BottomLayer w30: v2(4533.46,3072.83) 4534.45,3073.82 C30.1
NetC32_1: C32.1 U9.15 Y1.1 | length 538.6
  BottomLayer w10: U9.15 5368.09,2850.06 5406.19,2850.06 5445,2888.87 5445,3025 Y1.1 5602.6,3125 C32.1
NetC33_1: C33.1 U9.16 Y1.2 | length 374.2
  BottomLayer w10: U9.16 5405.79,2821.38 5426.91,2842.5 5462.5,2842.5 Y1.2 5590,2925 5635,2970 C33.1
NetD1_2: D1.2 R12.2 | length 65.7
  BottomLayer w15: R12.2 D1.2
NetD7_2: D7.2 K1.4 Q1.3 Q4.3 | length 3775.5
  TopLayer w30: v3(4400,2725) v3(4400,3080) ; v2(5081.69,3512.8) 5085.63,3516.73 v2(5085.63,3947.83) ; v2(5090.55,4353.35) 5090.55,4377.95 5085.63,4382.87 5092.52,4389.76 v2(5092.52,4610.24)
  BottomLayer w20: D7.2@4861.93,2313.98 Q4.3@4985,2313.98
  BottomLayer w30: v3(4400,2725) 4524.61,2600.39 4524.61,2373.03 4700.79,2196.85 4925.2,2196.85 4985,2256.65 Q1.3 ; v3(4400,3080) 4400,3109.65 4572.83,3282.48 4836.61,3282.48 v2@5081.69,3527.56 ; v2(5081.69,3512.8) v2@5081.69,3527.56 ; v2@5085.63,3531.5 v2@5081.69,3527.56 ; v2(5085.63,3947.83) v2@5085.63,4345.47 ; v2(5092.52,4610.24) 5096.46,4610.24 K1.4
NetD10_2: D10.2 R5.1 | length 1045.6
  TopLayer w15: v1(5160,2595) 5250,2595 5305,2650 v1(5325,2650)
  BottomLayer w15: R5.1@5135,2550 5135,2570 v1(5160,2595) ; v1(5325,2650) 5375,2600 5765,2600 5955,2790 D10.2
NetJ2_1: J2.1 R6.2 | length 79.9
  BottomLayer w30: J2.1@6399.88,4740.12 R6.2
NetJ2_2: J2.2 R4.1 | length 77.8
  BottomLayer w30: J2.2 6135.12,4746.77 R4.1
NetJ2_3: J2.3 R9.1 | length 66.9
  BottomLayer w30: R9.1 J2.3@6135.12,4626.93
NetJ2_4: J2.4 R11.2 | length 78.6
  BottomLayer w30: R11.2 J2.4@6399.88,4633.58
NetLED1_1: LED1.1 R16.2 | length 127.1
  BottomLayer w20: R16.2@7608.27,1944.88 7699.88,1944.88 LED1.1
NetLED2_1: LED2.1 R23.2 | length 72.6
  BottomLayer w15: R23.2 LED2.1
NetLED3_1: LED3.1 R24.2 | length 185.9
  BottomLayer w15: R24.2 7592.4,3697.4 7625,3730 LED3.1 ; R24.2@7607.4,3645 R24.2@7607.4,3662.4
NetLED4_1: LED4.1 R25.2 | length 104.7
  BottomLayer w15: R25.2 7690,3560 LED4.1
NetQ1_1: Q1.1 R5.2 R7.1 | length 180.7
  BottomLayer w15: Q1.1 5075,2510 5112.4,2472.6 R5.2
  BottomLayer w30: R7.1 R5.2
NetQ1_2: Q1.2 Q4.1 | length 96.4
  BottomLayer w30: Q4.1 Q1.2
NetQ2_3: Q2.3 U4.4 | length 2559.8
  BottomLayer w30: Q2.3 5347.44,4426.18 5347.44,4845.47 5581.69,5079.72 6598.43,5079.72 6705.71,4972.44 6705.71,4576.77 6568.94,4440 U4.4
NetQ3_3: Q3.3 U5.4 | length 1232
  BottomLayer w30: Q3.3@5372.72,3937.6 5556.18,4121.06 6033.94,4121.06 6055,4100 U5.4
NetR1_1: R1.1 U9.1 | length 1679.6
  BottomLayer w10: U9.1 5054.06,2715 5266.72,2715 5291.72,2690 5340,2690 5402.5,2627.5 5742.5,2627.5 5970,2855
  BottomLayer w15: 5970,2855 6170,2855 6290,2975 6290,3035.36 6375.2,3120.55 R1.1
NetR3_1: R3.1 R4.2 | length 79.9
  BottomLayer w30: R3.1 R4.2
NetR6_1: R6.1 U6.1 | length 89.1
  BottomLayer w30: R6.1 6520,4810.12 U6.1
NetR8_1: R8.1 R9.2 | length 79.8
  BottomLayer w30: R8.1 R9.2
NetR10_2: R10.2 U5.1 | length 170.5
  BottomLayer w15: U5.1 6870,3900 6907.4,3937.4 R10.2
NetR11_1: R11.1 U6.2 | length 84.1
  BottomLayer w30: R11.1 6520,4564.88 U6.2
NetR14_1: R14.1 R15.2 U2.3 | length 201.3
  BottomLayer w15: R15.2 7037.6,2590 U2.3 7217.4,2590 R14.1
NetR20_2: R20.2 U4.6 | length 50
  BottomLayer w50: R20.2 U4.6
NetR22_1: R22.1 U4.1 | length 517.1
  BottomLayer w15: U4.1 7020,4240 7055,4205 R22.1
NetR36_1: R36.1 VR2.1 | length 1415
  TopLayer w30: VR2.1 4331.69,3858.27 4328.74,3861.22 4389.76,3922.24 4638.78,3922.24 4638.78,4137.8 4603.35,4173.23 4603.35,4484.25 4731.3,4612.2 v2(4831.69,4612.2)
  BottomLayer w30: v2(4831.69,4612.2) R36.1@4831.69,4764.76
NetR37_2: R37.2 VR1.2 | length 1472.1
  TopLayer w20: v2(4588.58,3568.9) 4593.5,3563.98 v2(4593.5,2933.07)
  BottomLayer w20: VR1.2 4443.5,4077.36 4483.27,4117.13 4573.82,4117.13 4603.5,4087.44 4603.5,3583.82 v2(4588.58,3568.9) ; v2(4593.5,2933.07) 4595,2931.57 R37.2
NetR42_2: R42.2 R50.1 U9.20 | length 1915.7
  BottomLayer w10: R50.1@5170,3056.1 5170,2975 5185,2960 5236.72,2960 5270,2926.72 5270,2760 5310.98,2719.02 U9.20 5775.73,2719.02 5875.15,2818.43 5875.15,2820.25 5952.4,2897.5 6152.4,2897.5 6247.5,2992.6 6247.5,3052.96 6314.61,3120.07 6314.61,3329.61 6347.5,3362.5 R42.2
NetR43_2: R43.2 R51.1 U9.19 | length 1885.8
  BottomLayer w10: R51.1@5250,3061.02 5250,2975 5290.63,2934.37 5290.63,2769.37 5315.39,2744.61 U9.19 5773.04,2744.61 5855.15,2826.72 5855.15,2828.54 5944.11,2917.5 6144.11,2917.5 6227.5,3000.89 6227.5,3061.24 6294.61,3128.35 6294.61,3394.61 6345,3445 R43.2
NetR44_2: R44.2 R52.1 U9.18 | length 1891.6
  BottomLayer w10: R52.1@5310.63,3061.02 5310.63,2779.37 5319.8,2770.2 U9.18 5405,2770.2 5407.7,2767.5 5767.65,2767.5 5835.15,2835 5835.15,2836.82 5935.83,2937.5 6135.83,2937.5 6207.5,3009.17 6207.5,3069.53 6274.61,3136.63 6274.61,3459.61 6342.5,3527.5 R44.2
NetR45_2: R45.2 U9.17 | length 1556.8
  TopLayer w10: v1(5440,2665) 5445,2670 v1(5445,2805) v1@5445,2810
  BottomLayer w10: U9.17 5430.79,2795.79 5445,2810 v1(5445,2805) ; v1(5440,2665) 5750,2665 5895.15,2810.15 5895.15,2811.97 5960.68,2877.5 6160.68,2877.5 6267.5,2984.32 6267.5,3044.68 6334.61,3111.78 6334.61,3269.61 6345,3280 R45.2
NetR49_1: R49.1 U5.6 | length 325
  BottomLayer w40: R49.1 U5.6
NetU10_1: U10.1 Y2.1 | length 252.7
  BottomLayer w15: U10.1 6720,2965 6775,2910 6883.98,2910 Y2.1
NetU10_2: U10.2 Y2.2 | length 329.3
  BottomLayer w15: U10.2 6670,2955 6715,2910 6739.64,2910 6764.64,2885 6858.98,2885 Y2.2
NEUTRAL_IN: CT1.4 pad.0@3965.55,5031.5 pad.2 R32.2 | length 1797.5
  TopLayer w200: R32.2 3504.92,3704.8 pad.2 3738.19,3909.45 3738.19,4962.6 3807.09,5031.5 pad.0@3965.55,5031.5
PHASE: C2.1 C9.1 F1.2 L4.1 R2.2 R32.1 | length 4070.5
  TopLayer w50: L4.1 3759.37,2091.38 3759.37,2030.63 3795,1995 4375,1995 4402.56,2022.56 ; C2.1 4402.56,2022.56 ; R2.2 4524.61,2060.83 4513.78,2050 ; C9.1 4513.78,2050 ; 4402.56,2022.56 4430,2050 4513.78,2050
  TopLayer w80: R32.1 R32.1@3493.11,3401.57 ; L4.1 3758.23,2201.14 3791.34,2234.25 4029.53,2234.25 4116.14,2320.87 4116.14,3245.08 ; 3895.67,3401.57 3912.4,3384.84 ; F1.2@3912.4,3289.76 3912.4,3383.86 3912.4,3384.84 ; F1.2@3912.4,3489.76 3912.4,3384.84
  TopLayer w100: 3912.4,3383.86 3977.36,3383.86 4116.14,3245.08
  TopLayer w150: R32.1@3493.11,3401.57 3895.67,3401.57
PHASE_FIR: C20.1 C22.2 K1.1 pad.4@4390.75,5040.35 Q2.1 Q3.1 R8.2 R18.1 R36.2 | length 3314.8
  TopLayer w50: 5527.56,4174.21 5532.48,4174.21 5646.65,4288.39 5841.61,4288.39 C22.2
  TopLayer w90: K1.1@4949.8,4597.44 4949.8,4357.28 5132.87,4174.21 Q2.1 5527.56,4174.21 5562.01,4139.76 5562.01,3792.01 C20.1 5457.6,3687.6 Q3.1@5372.72,3687.6
  BottomLayer w50: R8.2 5834.88,4490.12 5890,4435 C22.2
  BottomLayer w80: pad.4@4390.75,5040.35 4914.37,5040.35 5001.97,4952.76 5001.97,4660.43 4954.72,4613.19 K1.1
PHASEIN: F1.1 pad.0@3466.54,3155.51 pad.0@3965.55,4654.53 | length 2637.1
  TopLayer w80: pad.0@3965.55,4654.53 4030.71,4589.37 4030.71,3614.96 4124.02,3521.65 v2(4124.02,3516.73)
  TopLayer w200: pad.0@3466.54,3155.51 3583.66,3155.51 3912.4,2826.77 F1.1@3912.4,2689.76
  BottomLayer w80: F1.1@3912.4,2889.76 4124.02,3101.38 v2(4124.02,3516.73)
PKD: J1.28 R24.1 | length 132.6
  BottomLayer w15: J1.28 R24.1 R24.1@7532.6,3645
POWERIN: D5.2 J1.1 Q4.2 R7.2 R16.1 U1.6 U3.1 | length 3446.3
  TopLayer w50: U1.6 6306.3,2396.3 6525,2615 v1(6650,2615) v1(6715,2615)
  BottomLayer w20: R16.1@7540,1921.26 7540,2036.42 D5.2@7540,2040.35
  BottomLayer w39: 7400,2260 J1.1
  BottomLayer w40: Q4.2@5065,2261.81 5148.62,2261.81 R7.2@5148.62,2308.98
  BottomLayer w50: R7.2 5344.09,2312.6 5431.5,2400 5910,2400 5985,2325 U3.1 ; v1(6715,2615) 6760,2615 6800,2575 6800,2435.24 6990,2245.24 6990,2155 7104.65,2040.35 D5.2@7540,2040.35 ; 7365,2043.31 7365,2225 7400,2260
RESET_ADE: R1.2 U8.13 | length 422.5
  BottomLayer w15: R1.2 6482.5,3197.5 6510,3225 6510,3280.36 6614.64,3385 6644.85,3385 6692.77,3432.91 U8.13
RL: D10.1 U8.12 | length 946.9
  BottomLayer w15: D10.1@6186.93,2785 6315,2913.07 6315,3025 6335,3045 6430,3045 6535,3150 6535,3270 6625,3360 6655.21,3360 6696.62,3401.42 U8.12
RST: C7.1 JP2.5 R30.1 U8.29 | length 1363.2
  TopLayer w15: v1(7017.5,3477.5) 7020,3475 7084.29,3475 7100,3490.71 7100,3523.43 7250,3673.43 7250,3706.57 7206.57,3750 v1(7200,3750)
  BottomLayer w15: v1(7017.5,3477.5) 7020,3475 7020,3430 7048.58,3401.42 U8.29 ; v1(7200,3750) 7243.11,3750 7535,4041.89 7535,4084.4 7563.8,4113.2 7578.2,4113.2 JP2.5@7592.6,4127.6 ; R30.1 C7.1 JP2.5@7592.6,4127.6 ; JP2.5 JP2.5@7592.6,4127.6
RST-: C23.1 C24.1 J1.9 R27.2 SW2.1 | length 1122.3
  BottomLayer w15: J1.9 7445,2695 7470,2720 7470,2975 7505,3010 7525,3010 7555,3040 7682.4,3040 ; C24.1 R27.2 7677.4,3295 7730,3295 7740,3285 7740,3090 7690,3040 7682.4,3040 ; SW2.1@7682.4,2987.4 7682.4,3040
RXCOMP: J1.5 L2.1 | length 554.9
  BottomLayer w35: J1.5 7465,2495 7495,2465 7500,2465
  BottomLayer w50: 7500,2465 7620,2465 7650,2435 L2.1
RXD: H1.2 J3.2 R31.1 R53.1 U8.30 | length 2717.8
  TopLayer w15: v1(6995,3395) 7012.5,3412.5 7045.89,3412.5 7058.39,3425 7105,3425 7152.5,3472.5 7152.5,3499.94 7300,3647.44 7300,3765 7150,3915 v1(7140,3915)
  BottomLayer w15: v1(6995,3395) 7015,3395 7040.08,3369.92 U8.30 7177.32,3369.92 R53.1 R31.1 ; v1(7140,3915) 7186.65,3915 7218.5,3946.85 7218.5,4731.5 7120,4830 7120,4920 7145,4945 7235,4945 7270,4980 7415,4980 7488.07,5053.07 J3.2
RXIN: C25.2 J1.4 L3.1 L6.1 | length 520.2
  BottomLayer w35: 7315,2430 7330,2445 J1.4
  BottomLayer w50: L3.1 L3.1@7175,2310 ; C25.2@7240,2180 L6.1 7170,2305 L3.1@7175,2310 ; 7315,2430 7295,2410 7295,2355 7250,2310 L3.1@7175,2310
SCK: JP2.7 R44.1 U8.17 | length 1488.6
  TopLayer w15: v1(6855,3495) 6910,3550 7050.36,3550 7112.5,3612.14 7112.5,3649.07 7138.43,3675 7195,3675 v1(7210,3690)
  BottomLayer w15: R44.1 6585.58,3527.5 6638.08,3580 6765,3580 6779.33,3594.33 U8.17 6809.53,3545.12 6855,3499.64 v1(6855,3495) ; v1(7210,3690) 7229.37,3690 7569.37,4030 JP2.7
SCL: R46.1 U8.9 U10.6 | length 588
  BottomLayer w15: R46.1 6480,2895 6500,2915 6500,3035 6620,3155 U10.6 6620,3235 6691.93,3306.93 U8.9
SDA: R47.1 U8.10 U10.5 | length 523.9
  BottomLayer w15: R47.1 6470,3012.6 6470,3045 6570,3145 U10.5 6570,3244.64 6660.36,3335 6739.17,3335 U8.10
SQW: R48.1 U8.1 U10.7 | length 1232.3
  TopLayer w15: v1(6915,3030) 6915,3075 v1(7000,3160)
  BottomLayer w15: R48.1 6470,2805 6525,2860 6525,3024.64 6635.36,3135 6670,3135 U10.7 6670,3235 6695,3260 6740,3260 6755,3245 6755,3170 6762.5,3162.5 6780.53,3162.5 6802.5,3140.53 6802.5,3122.5 6824.51,3100.49 6859.51,3100.49 6915,3045 v1(6915,3030) ; v1(7000,3160) 7030,3190 U8.1
SVC-: J1.8 R26.2 SW1.1 | length 383.1
  BottomLayer w15: J1.8 7445,2645 7495,2695 7682.4,2695 R26.2
TIIN1: CT1.1 R34.2 R35.2 VR1.3 | length 1146.4
  BottomLayer w40: R34.2@3849.41,3958.66 3859.25,3948.82 R35.2 3859.25,3728.35 CT1.1 4094.49,3678.15 4308.07,3891.73 4508.86,3891.73 4543.5,3926.38 VR1.3
TXON: J1.2 R23.1 | length 373.2
  TopLayer w20: J1.2 7585,2345 7665,2265 v1(7710,2265)
  BottomLayer w15: v1@7720,2282.5 R23.1
TXOUT: C25.1 D5.1 D6.2 J1.3 | length 404.4
  BottomLayer w39: J1.3 7514.53,2395 D6.2 7540,2235.87 7479.13,2175 C25.1
VBAT: J7.1 R12.1 U10.3 | length 231.7
  BottomLayer w15: R12.1 6567.6,2827.6 J7.1 U10.3
VDD5: C6.1 C21.1 C23.2 J1.29 L1.1 R26.1 R27.1 U3.3 U9.3 | length 5862.6
  TopLayer w15: J1.29 7480,3695 7530,3645 7530,3430 7550,3410 v3(7550,3295) ; v1(7505,3060) 7475,3030 7475,2840 7495,2820 7510,2820 v1(7525,2805)
  TopLayer w30: v3(7310,3110) v3(7310,3530)
  BottomLayer w15: 4983.29,2768.29 4985.2,2770.2 U9.3 ; v1(7505,3060) 7505,3150 7475,3180 7475,3260 7510,3295 7602.6,3295 R27.1 ; v1(7525,2805) 7555,2775 R26.1
  BottomLayer w20: C6.1@4802.4,2445 4830,2445 4895.98,2510.98 C21.1 4960,2679.02 4960,2745 4983.29,2768.29 4984.4,2768.29 ; C21.1@4895.98,2645 5205,2645 5350,2500 U3.3
  BottomLayer w30: U3.3 6065,2515 L1.1 6130,2585 6460,2585 6565,2690 6910,2690 6955,2645 6955,2545 6975,2525 7275,2525 7295,2545 7295,3095 v3(7310,3110) ; v3(7310,3530) 7330,3550 7330,3658.64 7361.36,3690 7395,3690 J1.29
VDD5D: C8.2 C11.1 JP2.2 L1.2 R13.2 R21.2 R30.2 R46.2 R47.2 R48.2 U8.4 U8.6 U8.18 U8.20 U9.2 U10.8 | length 7331.9
  TopLayer w15: v6(7030,4655) 7225,4460 7315,4460 v5(7495,4280) 7495,4365 7540,4410 7675,4410 7695,4390 JP2.2
  TopLayer w35: L1.2 6460,2745 6460,3035 6590,3165 6710,3165 v1(6755,3120) 6885,3120 v1(6935,3170)
  BottomLayer w15: 5010,2675 4995,2675 4987.5,2682.5 4987.5,2732.5 4999.61,2744.61 U9.2 ; U10.8 6720,3147.4 6810,3057.4 C11.1 6837.6,3057.4 6875,3020 6875,3013.43 6898.43,2990 6950,2990 6975,2965 6975,2880 7017.6,2837.4 R13.2 ; C8.2 6841.02,3678.62 6841.02,3548.98 6852.5,3537.5 6861.97,3537.5 6862.01,3537.46 6872.54,3537.46 6895,3515 6895,3450 6875,3430 6875,3367.5 6850,3342.5 6850,3308.43 6872.52,3285.91 U8.6 6872.52,3202.48 6895,3180 v1@6925,3180 ; 6905,3695 6905,3595.31 U8.20 6904.02,3540 6915,3529.02 6915,3441.57 6895,3421.57 6895,3388.43 6935.51,3347.92 U8.4 v1@6935.51,3190.51 ; R21.2 6962.4,4722.6 v6(7030,4655) ; R30.2 7380,4240 7410,4270 7495,4270 v5(7495,4280)
  BottomLayer w20: 5010,2675 5225,2675 5340,2560 5785,2560 5945,2720 6362.6,2720
  BottomLayer w30: L1.2@6367.6,2650 R48.2 R46.2 R47.2 ; C8.2 6905,3695 6950,3740 7062.82,3740 7095.32,3772.5 7119.97,3772.5 7169.97,3822.5 7204.68,3822.5 7285,3902.82 7285,4270 7375,4360 7490,4360 7540,4410 7675,4410 7695,4390 JP2.2
XIN: J1.25
XOUT: J1.24
ZEROCROSSING: R21.1 U6.3 U8.32 | length 1887.9
  TopLayer w15: v1(7175,3980) 7175,3946.57 7325,3796.57 7325,3606.5 7255,3536.5 v1(7255,3290)
  BottomLayer w15: U6.3 R21.1 6887.6,4682.4 7175,4395 v1(7175,3980) ; U8.32 7230,3306.93 7246.93,3290 v1(7255,3290)
ZX: U9.12
pads on no net: FID1.1 FID2.1 FID3.1 FID4.1 H1.1 H1.5 H1.6 J3.3 J3.5 K1.3 Q2.H Q3.H SW1.0 SW2.0 U4.3 U4.5 U5.3 U5.5 U8.2 U8.11 U8.19 U8.22 U8.23 U8.26 U8.27 U8.28 U9.13

## Polygon pours and split planes (outlines as drawn)
AGND on TopLayer "Top Layer-No Net" (solid, pour order 8): 5113.19,1075 6408.19,1075 6458.19,1125 6513.19,1180 6743.19,1180 6533.19,970 6523.19,960 6148.19,960 5758.19,960 5723.19,925 5723.19,750 5723.19,700 5753.19,670 5813.19,610 5813.19,465 5813.19,425 5833.19,405 5838.19,400 6343.19,400 6473.19,400 6578.19,505 6713.19,640 6978.19,640 7528.19,640 7603.19,565 7628.19,540 7628.19,380 7628.19,265 7643.19,250 7883.19,250 7913.19,250 7913.19,410 7913.19,1280 7993.19,1360 7993.19,1455 7993.19,1465 8113.19,1585 8308.19,1585 8443.19,1585 8443.19,-405 7098.19,-405 7098.19,-0.66 5113.85,-0.66 5113.19,0 5113.19,1075
GND on TopLayer "Top Layer-No Net" (solid, pour order 6): 7138.67,9457.76 8233.67,9457.76 8233.67,8027.76 7998.67,8027.76 7898.67,8027.76 7673.67,7802.76 7673.67,7582.76 7673.67,6702.76 7438.67,6702.76 7438.67,6977.76 7333.67,7082.76 7003.67,7082.76 6493.67,7082.76 6258.67,6847.76 5693.67,6847.76 5693.67,6982.76 5548.67,7127.76 5543.67,7132.76 5543.67,7317.76 5543.67,7332.76 5558.67,7347.76 6138.67,7347.76 6328.67,7347.76 6698.67,7717.76 6878.67,7897.76 7138.67,7897.76 7138.67,9457.76
AGND on BottomLayer "Top Layer-No Net" (solid, remove dead copper, pour order 7): 7990.29,2782.39 9285.29,2782.39 9335.29,2832.39 9390.29,2887.39 9620.29,2887.39 9410.29,2677.39 9400.29,2667.39 9025.29,2667.39 8635.29,2667.39 8600.29,2632.39 8600.29,2457.39 8600.29,2407.39 8630.29,2377.39 8690.29,2317.39 8690.29,2172.39 8690.29,2132.39 8710.29,2112.39 8715.29,2107.39 9220.29,2107.39 9350.29,2107.39 9455.29,2212.39 9590.29,2347.39 9855.29,2347.39 10405.29,2347.39 10480.29,2272.39 10505.29,2247.39 10505.29,2087.39 10505.29,1972.39 10520.29,1957.39 10760.29,1957.39 10790.29,1957.39 10790.29,2117.39 10790.29,2987.39 10870.29,3067.39 10870.29,3162.39 10870.29,3172.39 10990.29,3292.39 11185.29,3292.39 11320.29,3292.39 11320.29,1302.39 9975.29,1302.39 9975.29,1706.73 7990.95,1706.73 7990.29,1707.39 7990.29,2782.39
GND on BottomLayer "Top Layer-No Net" (solid, remove dead copper, pour order 5): 9723.17,5372.48 10818.17,5372.48 10818.17,3942.48 10583.17,3942.48 10483.17,3942.48 10258.17,3717.48 10258.17,3497.48 10258.17,2617.48 10023.17,2617.48 10023.17,2892.48 9918.17,2997.48 9588.17,2997.48 9078.17,2997.48 8843.17,2762.48 8278.17,2762.48 8278.17,2897.48 8133.17,3042.48 8128.17,3047.48 8128.17,3232.48 8128.17,3247.48 8143.17,3262.48 8723.17,3262.48 8913.17,3262.48 9283.17,3632.48 9463.17,3812.48 9723.17,3812.48 9723.17,5372.48

## Keep-outs
KeepOutLayer:
  lines w5: 2475,1790 2475,5390 5475,5390 7795,5390 7795,1790 2475,1790

## Silkscreen, mask and mechanical layers (free items; w line width, h text height)
TopOverlay:
  rectangle: 380,2600 980,2875
  rectangle: 965,3595 1240,4195
  rectangle: 6116.18,5848.58 6598.43,6213.58
  rectangle: 2475,5310 7790,5390
  rectangle: 2475,1790 7790,1870
  rectangle: 7080,2825 7250,3240
  lines w5: 7680,3850 7795,3850
  lines w15: 7290,2280 7290,2310 7305,2295 7290,2280 ; 7560,4425 7590,4395 7620,4425 7570,4425 7560,4425
  text "ASSEM:" at 5417.32,5173.23 h40
  text "REV: SS-08-2013" at 6165,5160 h60
  text "No" at 3570.87,4998.03 h100 r270
  text "filter" at 4148.62,4954.72 h100 r270
  text "Po" at 3577.76,4398.62 h100 r270
  text "Pi" at 3607.28,3734.25 h100
  text "Ni" at 3614.17,3382.87 h100
  text "C+" at 3600.39,2737.2 h100 r270
  text "C-" at 3593.5,2288.39 h100 r270
BottomSolder:
  lines w15: 5850,3780 5960,3890 5960,3900
  lines w20: 5835,4560 5835,4490 5890,4435 5890,4240 ; 5850,3780 5960,3890 5960,3900 ; 5960,4055 5960,3900 ; 6040,3900 5960,3900 ; 6195,3900 6285,3900 6520,3900
  lines w30: 4203.98,2080 4225,2101.02 ; 5760,4700 5815,4755 5815,4900 5870,4955 6210,4955 6220,4955 6265,4910 ; 6190,4240 6315,4240 ; 6265,4240 6265,4410

## Text inside footprints (layer, text, board x,y; h text height)
H1: TopOverlay "1" at 7162.39,4975.26 h39.37 r180; TopOverlay "3" at 7256.39,4713.26 h39.37 r180; TopOverlay "2" at 7171.39,4718.26 h39.37 r180; TopOverlay "4" at 7263.39,4968.26 h39.37 r180
U1: TopOverlay "N" at 4270,2875 h100 r90; TopOverlay "L" at 4270,2180 h100 r90; TopOverlay "-DC" at 5675,3135 h100; TopOverlay "+DC" at 5655,2335 h100
U2: TopOverlay "431" at 7045,2730 h40 r270